# Altium PCB soldeerstation.PcbDoc
Units mil, origin at the board's own origin, x right, y up, seen from the top; angles counter-clockwise.
Board outline 6885 x 2720 mil, 2 copper layers (Top Layer, Bottom Layer); 64 components, 56 nets, 226 pads, 82 vias.
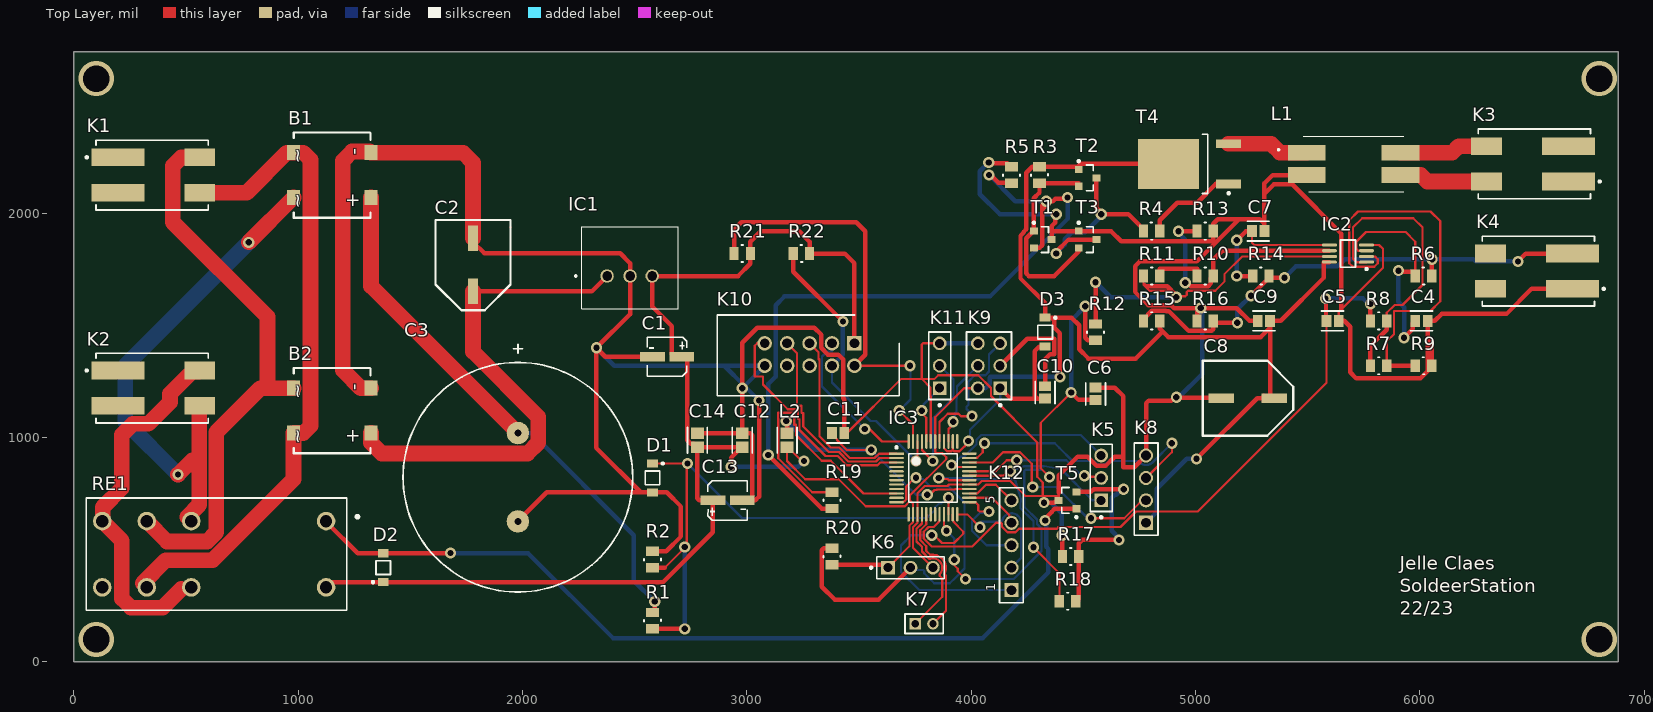
[diagram p0: Top Layer view]
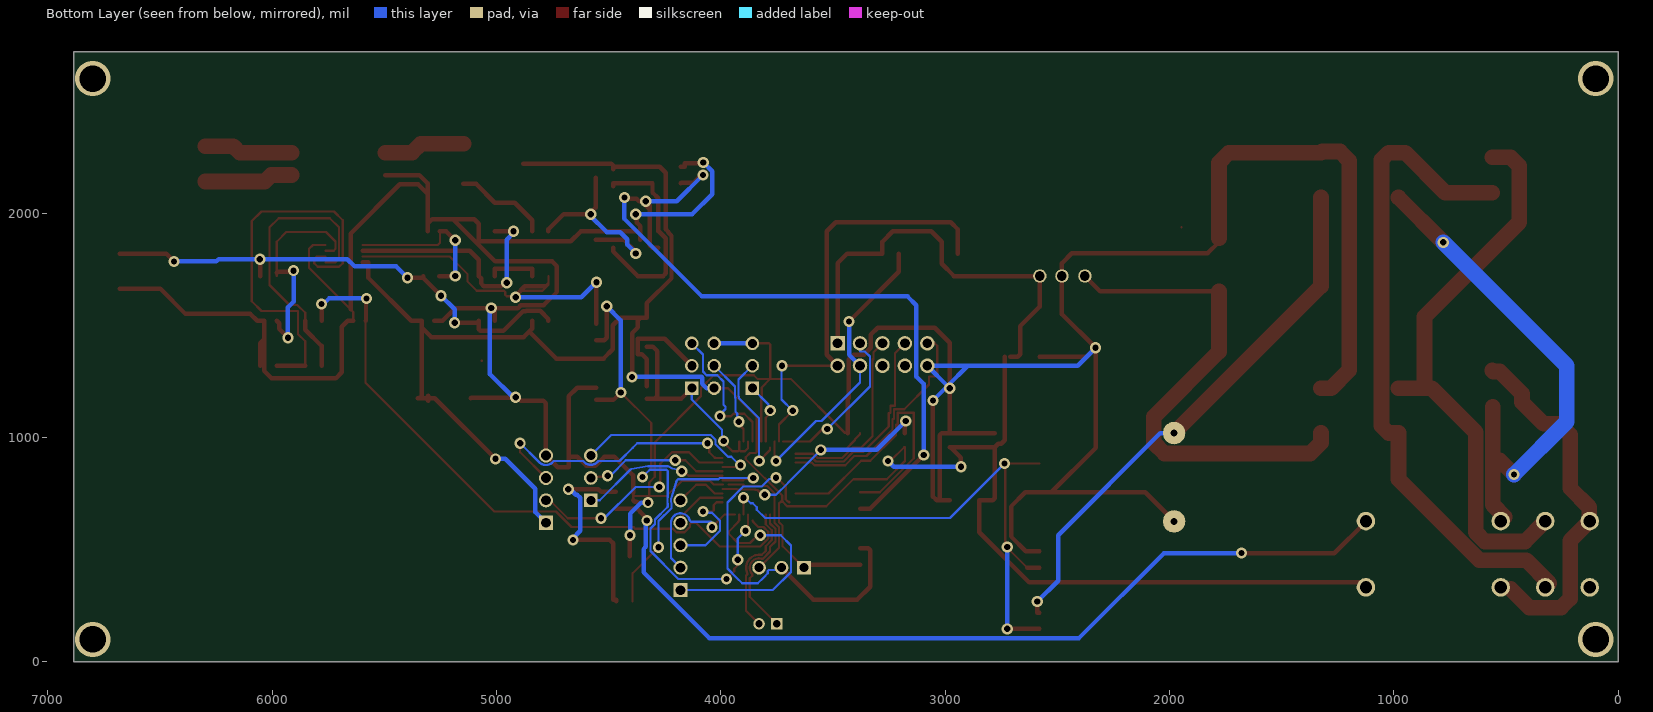
[diagram p1: Bottom Layer view, seen from below]

## Layer stack, top to bottom
Top Solder: solder mask 0.4, Solder Resist, Dk 3.5
Top Layer: signal copper 1.4
Dielectric 1: dielectric 12.6, FR-4, Dk 4.8
Bottom Layer: signal copper 1.4
Bottom Solder: solder mask 0.4, Solder Resist, Dk 3.5

## Board outline
0,0 6885,0 6885,2720 0,2720

## Design rules (kind name [scope] priority, off if disabled: settings)
Clearance [All] p1: gap=4 ignorepadtopadclearanceinfootprint=FALSE
MinimumSolderMaskSliver [All] p1: minsoldermaskwidth=3
PolygonConnect [All] p1: connectstyle=Relief reliefconductorwidth=10 reliefentries=4 polygonreliefangle="90 Angle" airgapwidth=10
RoutingVias [All] p1: holewidth=28 width=50 viastyle="Through Hole" minholewidth=28 minwidth=50 maxholewidth=28 maxwidth=50
SolderMaskExpansion [All] p1: expansion=4 istentingtop=FALSE
Width [All] p1: maxlimit=100 minlimit=10 preferedwidth=20 minimp=50.000000 maximp=50.000000 favimp=50.000000
29 further rules are at their usual default settings.

## Classes and differential pairs
component class voeding: B1 B2 C1 C2 C3 D1 D2 IC1 K1 K2 R1 R2 RE1
component class thermokoppel: C4 C5 C6 C7 C8 C9 IC2 K4 R6 R7 R8 R9 R10 R11 R12 R13 R14 R15 R16
component class PWM: K3 L1 R3 R4 R5 T1 T2 T3 T4
component class CPU: C10 C11 C12 C13 C14 D3 IC3 K5 K6 K7 K8 K9 K10 K11 K12 L2 R17 R18 R19 R20 R21 R22 T5

## Components (designator, comment, footprint, x,y, rotation, side; value= is the part's Value field where it differs from the comment)
B1 "Bridge_Rectifier" TTF 1150,2170 r270 top
B2 "Bridge_Rectifier" TTF 1150,1120 r270 top
C1 "10µf" D4L5.4 2650.86,1440.65 r180 top
C2 "100µf" CE_D8_L10 1780,1770 r270 top
C3 "4700µf" CE_D25_L25_plugin 1980,626.3 r90 top
C4 "10n" CC_0805_m 6007.59,1520 r0 top value="0.22 μF"
C5 "10n" CC_0805_m 5611.53,1520 r0 top value="0.22 μF"
C6 "10n" CC_0805_m 4555,1195 r90 top value="0.22 μF"
C7 "10n" CC_0805_m 5280,1920 r0 top value="0.22 μF"
C8 "10µf" CE_D8_L10 5233.11,1175 r0 top
C9 "100n" CC_0805_m 5305,1520 r180 top value="0.22 μF"
C10 "100n" CC_0805_m 4330,1201.53 r90 top value="0.22 μF"
C11 "100n" CC_0805_m 3407.59,1020 r0 top value="0.22 μF"
C12 "100n" CC_0805_L 2980,988.47 r90 top value="0.22 μF"
C13 "10µf" D4L5.4 2909.14,639.36 r0 top
C14 "100n" CC_0805_L 2780,988.47 r90 top value="0.22 μF"
D1 "Zener_Diode" SOD-123FL 2580,820 r270 top
D2 "1N4007" SOD-123FL 1380,420 r90 top value=15pF
D3 "1N4148" SOD-123FL 4330,1470 r270 top value=15pF
IC1 "OKI-78SR-5/1.5-W36-C" OKI78SR515W36C 2377.64,1720 r0 top
IC2 "Dual_Opamp" MSOP_8_M 5680,1820 r180 top
IC3 "ATMEGA4809" TQFP_48_M 3830,820 r0 top
K1 "2060-452/998-404" WAGO-2060-452_V 380,2170 r0 top
K2 "2060-452/998-404" WAGO-2060-452_V 380,1220 r0 top
K3 "2060-452/998-404" WAGO-2060-452_V 6480,2220 r180 top
K4 "2060-452/998-404" WAGO-2060-452_V 6497.91,1741.26 r180 top
K5 "22-28-4033" MOLX-22-28-4033_V 4580,820 r90 top
K6 "22-28-4033" MOLX-22-28-4033_V 3730,420 r0 top
K7 "M22-2510205" FP-M22-2510205-MFG 3790.63,170 r0 top
K8 "61300411121" 61300411121 4780,770 r90 top
K9 "TSW-103-07-G-D" SMTC-TSW-103-07-G-D_V 4080,1320 r90 top
K10 "5x2 box pinheader" "2x5 box pinheader" 3480,1420 r180 top
K11 "22-28-4033" MOLX-22-28-4033_V 3860,1320 r90 top
K12 "61300511121" 61300511121 4180,520 r90 top
L1 "Common_Mode_Choke" 2545 5705,2220 r270 top
L2 "Choke" CC_0805_L 3180,988.47 r270 top
R1 "68K" R_0805_M 2580,183.58 r90 top
R2 "10K" R_0805_M 2580,456.42 r270 top
R3 "4K7" R_0805_M 4305,2170 r90 top
R4 "100 ohm" R_0805_M 4805,1920 r180 top
R5 "4K7" R_0805_M 4180,2170 r270 top
R6 "5K6" R_0805_M 6016.42,1720 r0 top
R7 "18K" R_0805_M 5816.42,1320 r0 top
R8 "5K6" R_0805_M 5816.42,1520 r0 top
R9 "100 ohm" R_0805_M 6016.42,1320 r0 top
R10 "18K" R_0805_M 5043.58,1720 r0 top
R11 "18K" R_0805_M 4805,1720 r0 top
R12 "5K6" R_0805_M 4555,1470 r270 top
R13 "100 ohm" R_0805_M 5043.58,1920 r0 top
R14 "5K6" R_0805_M 5291.42,1720 r0 top
R15 "1M" R_0805_M 4805,1520 r0 top
R16 "10M" R_0805_M 5043.58,1520 r0 top
R17 "4K7" R_0805_M 4443.58,470 r0 top
R18 "10K" R_0805_M 4430,270 r0 top
R19 "10K" R_0805_M 3380,720 r90 top
R20 "4K7" R_0805_M 3380,470 r270 top
R21 "4K7" R_0805_M 2980,1820 r0 top
R22 "4K7" R_0805_M 3243.58,1820 r0 top
RE1 "RELAY_GENERAL_PURPOSE" RT42 1125,480 r180 top
T1 "Transistor_NPN" SOT_23 4319.37,1882.6 r0 top
T2 "Transistor_NPN" SOT_23 4519.37,2157.4 r0 top
T3 "Transistor_PNP" SOT_23 4519.37,1882.6 r0 top
T4 "MOSFET_P" TO_252 4974.49,2220 r180 top
T5 "Transistor_NPN" SOT_23 4430,720 r180 top

## Footprints (in the part's own frame and the unit in brackets; to place one, negate y for a bottom-side part, rotate by r counter-clockwise, add the part's x,y. Pads: shape width x height; smd on the part's side, far side on the other; paste and mask are expansions set on the pad)
"2x5 box pinheader" [mm]
  rect 1.65x1.65 hole 1.1: 1(0,0)
  round 1.65 hole 1.1: 2(0,2.54) 3(2.54,0) 4(2.54,2.54) 5(5.08,0) 6(5.08,2.54) 7(7.62,0) 8(7.62,2.54) 9(10.16,0) 10(10.16,2.54)
  silkscreen extent -5.08,-3.21 15.54,5.95, body extent -5.08,-3.2 15.24,5.74, height 9.15
2545 [mm]
  rect 1.78x4.27 smd: 1(-1.27,-5.305) 2(1.27,-5.305) 3(1.27,5.305) 4(-1.27,5.305)
  silkscreen extent -3.15,-8.6 3.15,5.69, body extent -3.15,-7.26 3.15,7.26, height 9.6
61300411121 [mm] "Pin Header, pitch 2.54 mm, THT, Vertical, single row, 4p"
  rect 1.6x1.6 hole 1.1: 1(-3.81,0)
  round 1.6 hole 1.1: 2(-1.27,0) 3(1.27,0) 4(3.81,0)
  silkscreen extent -5.23,-1.34 5.23,1.34, body extent -5.08,-1.27 5.08,1.27, height 8.57
61300511121 [mm] "Pin Header, pitch 2.54 mm, THT, Vertical, single row, 5p"
  rect 1.6x1.6 hole 1.1: 1(-5.08,0)
  round 1.6 hole 1.1: 2(-2.54,0) 3(0,0) 4(2.54,0) 5(5.08,0)
  silkscreen extent -6.5,-1.35 6.5,1.35, body extent -6.35,-1.27 6.35,1.27, height 8.57
CC_0805_L [mil]
  rect 51.36x57.33 smd paste+0 mask+0: 1(-31.53,0) 2(31.53,0)
  silkscreen extent -57,-44 57,44, body extent -67,-39 67,39, height 10
CC_0805_m [mil]
  rect 43.49x53.39 smd paste+0 mask+0: 1(-27.59,0) 2(27.59,0)
  silkscreen extent -49,-44 49,44, body extent -53,-32 53,32, height 10
CE_D8_L10 [mm]
  rect 2.9x1.1 smd: 1(-3,0) 2(3,0)
  Top Layer lines w0.254: -4.25,4.241 -4.259,4.25
  silkscreen extent -5.08,-4.25 5.16,4.25
CE_D25_L25_plugin [mm]
  round 2.54 hole 0.8: 1(0,0) 2(10,0)
  silkscreen extent -8,-13 20.07,13
D4L5.4 [mm]
  rect 2.8x1.1 smd: 1(1.8,2.048) 2(-1.521,2.048)
  silkscreen extent -2.08,-0.18 2.38,4.27
FP-M22-2510205-MFG [mm]
  rect 1.3x1.3 hole 0.8 paste-1000 mask+0: 1(-1,0)
  round 1.3 hole 0.8 paste-1000 mask+0: 2(1,0)
  silkscreen extent -2.17,-1.1 2.18,1.1, body extent -2.27,-1.2 2.27,1.2, height 0.25
MOLX-22-28-4033_V [mm] "THD, 3-Leads, Body 7.62x2.49mm, Pitch 2.54mm"
  rect 1.55x1.55 hole 1.02: 1(-2.54,0)
  round 1.55 hole 1.02: 2(0,0) 3(2.54,0)
  silkscreen extent -4.58,-1.25 3.81,1.25, body extent -3.81,-1.24 3.81,1.24, height 8.38
MSOP_8_M [mm] "TSOP, 8-Leads, Body 3x3mm, Pitch 0.65mm, IPC Medium Density"
  oval 1.7x0.35 smd: 1(-2.1,0.975) 2(-2.1,0.325) 3(-2.1,-0.325) 4(-2.1,-0.975) 5(2.1,-0.975) 6(2.1,-0.325) 7(2.1,0.325) 8(2.1,0.975)
  silkscreen extent -2.22,-1.55 0.85,1.87, body extent -1.55,-1.55 1.55,1.55, height 1.1
OKI78SR515W36C [mm]
  round 1.519 hole 1.08: 1(0,0) 2(2.6,0) 3(5.1,0)
  silkscreen extent -3.6,-3.7 8.05,5.6, body extent -2.85,-3.7 8.05,5.6, height 16.6
R_0805_M [mm] "Chip Resistor, 2-Leads, Body 2.00x1.25mm, IPC Medium Density"
  rect 1.05x1.45 smd: 1(-0.925,0) 2(0.925,0)
  silkscreen extent -0.1,-0.97 0.13,0.97, body extent -1.1,-0.72 1.1,0.72, height 0.5
RT42 [mm]
  round 2.1 hole 1.4: 11(20.3,3.75) 12(15.26,3.75) 14(25.34,3.75) 21(20.3,-3.75) 22(15.26,-3.75) 24(25.34,-3.75) A1(0,3.75) A2(0,-3.75)
  silkscreen extent -3.67,-6.35 27.16,6.35, body extent -2.21,-6.35 26.79,6.35, height 15.86
SMTC-TSW-103-07-G-D_V [mm] "THD, 6-Leads, Body 7.62x5.08mm, Pitch 2.54mm"
  rect 1.55x1.55 hole 1.02: 1(-2.54,-1.27)
  round 1.55 hole 1.02: 2(-2.54,1.27) 3(0,-1.27) 4(0,1.27) 5(2.54,-1.27) 6(2.54,1.27)
  silkscreen extent -4.58,-2.54 3.81,2.54, body extent -3.81,-2.54 3.81,2.54, height 8.38
SOD-123FL [mm] "SOD, 2-Leads, Body 2.7x1.65mm"
  rect 0.91x1.22 smd: 1(-1.635,0) 2(1.635,0)
  silkscreen extent -1.76,-0.82 0.78,1.29, body extent -1.35,-0.82 1.35,0.82, height 1
SOT_23 [mm] "SOT23, 3-Leads, Body 2.92x1.3mm, Pitch 0.95mm"
  rect 0.9x0.8 smd: 1(-1,0.95) 2(-1,-0.95) 3(1,0)
  silkscreen extent -1.12,-1.46 0.65,2.02, body extent -0.65,-1.46 0.65,1.46, height 1.11
TO_252 [mm] "DPAK, 3-Leads, Body 6.5x6.12mm, Pitch 2.28mm, IPC Low Density"
  rect 2.85x1 smd: 1(-4.4,2.28) 3(-4.4,-2.28)
  rect 6.9x5.65 smd: 2(2.4,0)
  silkscreen extent -4.53,-3.35 -1.45,3.45, body extent -2.05,-3.32 4.17,3.32, height 2.35
TQFP_48_M [mm]
  rect 1.655x0.252 smd paste+0 mask+0: 1(-4.125,2.75)
  rrect100% 1.655x0.252 smd paste+0 mask+0: 2(-4.125,2.25) 3(-4.125,1.75) 4(-4.125,1.25) 5(-4.125,0.75) 6(-4.125,0.25) 7(-4.125,-0.25) 8(-4.125,-0.75) 9(-4.125,-1.25) 10(-4.125,-1.75) 11(-4.125,-2.25) 12(-4.125,-2.75) 25(4.125,-2.75) 26(4.125,-2.25) 27(4.125,-1.75) 28(4.125,-1.25) 29(4.125,-0.75) 30(4.125,-0.25) 31(4.125,0.25) 32(4.125,0.75) 33(4.125,1.25) 34(4.125,1.75) 35(4.125,2.25) 36(4.125,2.75)
  rrect100% 0.252x1.655 smd paste+0 mask+0: 13(-2.75,-4.125) 14(-2.25,-4.125) 15(-1.75,-4.125) 16(-1.25,-4.125) 17(-0.75,-4.125) 18(-0.25,-4.125) 19(0.25,-4.125) 20(0.75,-4.125) 21(1.25,-4.125) 22(1.75,-4.125) 23(2.25,-4.125) 24(2.75,-4.125) 37(2.75,4.125) 38(2.25,4.125) 39(1.75,4.125) 40(1.25,4.125) 41(0.75,4.125) 42(0.25,4.125) 43(-0.25,4.125) 44(-0.75,4.125) 45(-1.25,4.125) 46(-1.75,4.125) 47(-2.25,4.125) 48(-2.75,4.125)
  silkscreen extent -4.25,-2.75 2.75,3.58, body extent -5.2,-5.2 5.2,5.2, height 0.25
TTF [mm]
  rect 1.7x1.5 smd: 1(2.54,4.445) 2(-2.54,4.445) 3(-2.54,-4.318) 4(2.54,-4.318)
  silkscreen extent -4.83,-4.3 4.83,4.4
WAGO-2060-452_V [mm] "Terminal Block, 2-Leads, Body 12.7x7.9mm, Pitch 4mm"
  rect 6x2 smd: 1(-4.625,2) 2(-4.625,-2)
  rect 3.5x2 smd: MP1(4.625,2) MP2(4.625,-2)
  silkscreen extent -8.3,-3.95 5.57,3.95, body extent -7.12,-3.95 5.58,3.95, height 4.5

## Part data
B1 B2: Average Rectified Current-Max=0.8A, Forward Voltage=1V, Manufacturer="Diodes Inc", Package Description="4-Pin Small Outline Integrated Circuit, Body 4.7 x 3.8 mm, Pitch 2.5 mm", Package Reference=MiniDIP-4, Package Version=05/2016, Peak Current-Max=30A, Reverse Current-Max=5µA, Reverse Voltage-Max [Vrrm]=600V, Datasheet URL=http://www.diodes.com/_files/datasheets/ds17003.pdf, Datasheet Version="Rev. 13-2, 12/2010", Manufacturer URL=http://www.diodes.com/, Mounting Technology=SurfaceMount, Package URL=http://www.diodes.com/_files/packages/MiniDIP.pdf
C1 C2 C3 C8 C13: library part Capacitor_Electrolytic, Manufacturer=Panasonic, Max Operating Temperature="105 degC", Min Operating Temperature="-55 degC", Package Quantity=500, Voltage Rating="25 V", ComponentLink1Description="Manufacturer URL", ComponentLink1URL=http://www.panasonic.com/, ComponentLink2Description=Datasheet, ComponentLink2URL=http://industrial.panasonic.com/cdbs/www-data/pdf/RDE0000/ABA0000C1181.pdf, DatasheetVersion=03/2016, Height="10.2 mm", Lead Pitch="3.1 mm", Length="10.2 mm", Mount="Surface Mount", Mounting Technology="Surface Mount", PackageDescription="2-Pin Electrolytic Aluminum Capacitor, Body 8.3 x 8.3 mm", PackageReference=EEE-FK1E221P, Packaging="Tape and Reel", Pins=2, REACH SVHC="No SVHC", RoHSCompliant=true
C4 C5 C6 C7 C9 C10 C11 C12 C14: library part Capacitor_Ceramic, Capacitance="0.22 μF", Manufacturer=KEMET, Manufacturer Part Number=C0805C224K5RACTU, Package=C0805C-DN, Temperature="-55°C to +125°C", Temperature Characteristic=X7R, Temperature Coefficient=30ppm/°C, Temperature Range High=+125°C, Temperature Range Low=-55°C, Tolerance=0.1, Voltage Rating="50 V", Automotive=No, Category=Cap, ComponentLink2Description=Datasheet, ComponentLink2URL=https://content.kemet.com/datasheets/KEM_C1003_C0G_SMD.pdf, Device Class L1="Passive Components", Device Class L2=Capacitors, Device Class L3="Ceramic Capacitors", Digikey Description="CAP CER 0.22UF 50V X7R 0805", Height=0.88mm, Ipc Land Pattern Name=CAPC200125X78, Lead Free=Yes, Material=Ceramic, Mouser Description="CAP CER 0.22UF 50V X7R 0805", Octopart=https://octopart.com/c0805c224k5ractu-kemet-144670, RoHS=TRUE
D1: Manufacturer="On Semiconductor", PartNumber=1SMB5920BT3G, ComponentLink1Description="Manufacturer URL", ComponentLink1URL=http://www.onsemi.com/, ComponentLink2Description=Datasheet, ComponentLink2URL=http://www.onsemi.com/pub_link/Collateral/1SMB5913BT3-D.PDF, ComponentLink3Description="Package Specification", ComponentLink3URL=http://www.onsemi.com/pub_link/Collateral/1SMB5913BT3-D.PDF, DatasheetVersion="Rev. 8", Mounting Technology="Surface Mount", PackageDescription="2-Pin Small Molded Package, J-Bend Lead, Body 4.33 x 3.625 mm", PackageReference=SMB-2-403A-03_H, PackageVersion="Rev. H, 05/2011", Packing="Tape and Reel", RoHS=Pb-Free, VZ Typ (V)=6.2
D2: library part Diode, Capacitance=15pF, Forward Current=1A, Manufacturer=Diotec, Max Junction Temp=+175°C, Max Repetitive Reverse Voltage=1000V, Max Surge Forward Current=27A, Peak Reverse Current=5uA, Temperature="-50°C to +175°C", Temperature Range Low=-50°C, Automotive=No, Category=Diode, ComponentLink2Description=Datasheet, ComponentLink2URL=https://datasheet.octopart.com/1N4007-Diotec-datasheet-62346875.pdf, Device Class L1="Discrete Semiconductors", Device Class L2=Diodes, Device Class L3="Rectifier Diodes", Height=2.8mm, Ipc Land Pattern Name=DIOAD888W100L520D280, Lead Free=Yes, Manufacturer Part Number=1N4007, Octopart=https://octopart.com/1n4007-diotec-4040411, Package=1N4007, Reverse Voltage=1000V, RoHS=TRUE, Temperature Range High=+175°C
D3: library part Diode, Capacitance=15pF, Forward Current=1A, Manufacturer=Diotec, Manufacturer Part Number=1N4007, Max Junction Temp=+175°C, Max Repetitive Reverse Voltage=1000V, Max Surge Forward Current=27A, Peak Reverse Current=5uA, Temperature="-50°C to +175°C", Temperature Range Low=-50°C, Automotive=No, Category=Diode, ComponentLink2Description=Datasheet, ComponentLink2URL=https://datasheet.octopart.com/1N4007-Diotec-datasheet-62346875.pdf, Device Class L1="Discrete Semiconductors", Device Class L2=Diodes, Device Class L3="Rectifier Diodes", Height=2.8mm, Ipc Land Pattern Name=DIOAD888W100L520D280, Lead Free=Yes, Octopart=https://octopart.com/1n4007-diotec-4040411, Package=1N4007, Reverse Voltage=1000V, RoHS=TRUE, Temperature Range High=+175°C
IC1: "Non-Isolated DC/DC Converter, 7.5 W, 7 to 36 V, 1.5 A, -40 to 85 degC, 3-Pin THD, RoHS", Current - Output (Max)=1.5A, Manufacturer=Murata, Operating Temperature=-40degC~85degC, Package / Case=3-SIPModule, Power (Watts) - Manufacture Series=8W, Voltage - Input (Max)=36V, Voltage - Input (Min)=7V, Voltage - Isolation=-, Voltage - Output 1=5V, Applications=ITE(Commercial), Category=PowerSupplies-BoardMount, Datasheet URL=https://datasheet.ciiva.com/8006/1790439-8006672.pdf, Datasheet Version=Oct-13, Efficiency=90.5%, Family=DCDCConverters, Features=SCP, Manufacturer URL=http://www.murata.com/, Mounting Type=ThroughHole, Number of Outputs=1, Packaging=Tube, Power (Watts) - Max=8W, Series=Okami™OKI-78SR, Size / Dimension="0.41\"Lx0.30\"Wx0.65\"H(10.4mmx7.6mmx16.5mm)", Type=LinearRegulatorReplacement, Voltage - Output 2=-, Voltage - Output 3=-
IC2: Case/Package=PDIP, Input Bias Current=1pA, Input Offset Voltage (Vos)=4.5mV, Max Operating Temperature=125°C, Max Supply Voltage=6V, Min Operating Temperature=-40°C, Min Supply Voltage=1.8V, Nominal Supply Current=100uA, Operating Supply Voltage=5.5V, Output Current=23mA, Package Quantity=60, Power Supply Rejection Ratio (PSRR)=86dB, Voltage Gain=112dB, Amplifier Type="GENERAL PURPOSE", Bandwidth=1MHz, Common Mode Rejection Ratio=60dB, Gain Bandwidth Product=1MHz, Height=3.3mm, Input Offset Voltage-Max=4.5mV, Lead Free="Lead Free", Length=9.27mm, Mount="Through Hole", Number of Amplifiers=2, Number of Channels=2, Number of Circuits=2, Number of Elements=2, Number of Pins=8, Operating Supply Current=100uA, Output Current per Channel=23mA, Packaging=Rail/Tube, Radiation Hardening=No, REACH SVHC="No SVHC", RoHS Compliant=Yes, Slew Rate=0.6V/µs, Slew Rate-Nom=0.6V/µs, Supply Current=100uA, Technology=CMOS, Unity Gain Bandwidth Product=1MHz, Width=6.35mm
IC3: Case/Package=TQFP, Max Operating Temperature=85°C, Min Operating Temperature=-40°C, Core Architecture=AVR, Interface=I2C, Memory Size=48KB, Memory Type=FLASH, Mount="Surface Mount", Number of I/Os=41, Oscillator Type=Internal, Peripherals="Brown-out Detect/Reset", RoHS Compliant=Yes, Series="megaAVR® 0, Functional Safety (FuSa)"
K1 K2 K3 K4: library part WAGO-2060, "Terminal Block, Pitch 4 mm, 1 x 2 Position, Height 4.5 mm, -60 to 105 degC, RoHS, Tape and Reel", Colour=White, Manufacturer=WAGO, Nominal current=9A, Nominal voltage=160V, Package Description="Terminal Block, Pitch 4 mm, 1 x 2 Position, Height 4.5 mm", Package Reference=2060-452, AWG=24-18, Connection=Pullspring, Contact material=Tinplated, Content=1pc(s), Datasheet URL=http://www.wago.com/infomaterial/pdf/60255126.pdf, Datasheet Version=03/2015, Height=4.5mm, Length=7.9mm, Manufacturer part No.=2060-452/998-404, Manufacturer URL=http://global.wago.com/en/index-en.jsp, Material=PPA-GFenclosure·Tin-platedcoppercontacts, Max. cross section (flexible)=0.75mm², Max. cross section (inflexible)=0.75mm², Min. cross section (flexible)=0.25mm², Min. cross section (unflexible)=0.2mm², Mounting Technology=SurfaceMount, Number of contacts=2, Pitch=4mm, Stripping length=6-7mm, Type=2060-452/998-404, Width=10.1mm
K5 K6 K11: library part CMP-1676-00001-5, "Male Header, Pitch 2.54 mm, 1 x 3 Position, Height 8.38 mm, Tail Length 3.18 mm, RoHS, Bulk", Colour=Black, Current Rating="4 A", Manufacturer=Molex, Max Operating Temperature="75 degC", Min Operating Temperature="0 degC", Package Quantity=1, Voltage Rating="250 V", ComponentLink1Description="Manufacturer URL", ComponentLink1URL=http://www.molex.com/, ComponentLink2Description=Datasheet, ComponentLink2URL=http://www.molex.com/pdm_docs/sd/022284033_sd.pdf, Contact Finish=Gold, Contact material=Brass, Contact Plating=Gold, DatasheetVersion="Rev. G, 01/2012", Height="8.38 mm", Lead Pitch="0.1 inch", Length="7.62 mm", Mount="Through Hole", Mounting Technology="Through Hole", PackageDescription="Male Header, Pitch 2.54 mm, 1 x 3 Position, Height 8.38 mm, Tail Length 3.18 mm", PackageReference=22-28-4033, Packaging=Bulk, Pins=3, REACH SVHC=Unknown, RoHSCompliant=true, Rows=1
K7: library part CMP-15831-000005-1, "CONN HEADER VERT 2POS 2MM", Current Rating=2A, Manufacturer=Harwin, Package=0, Temperature="-40°C to +105°C", Temperature Range High=+105°C, Temperature Range Low=-40°C, Automotive=No, Category=Conn, ComponentLink2Description=Datasheet, ComponentLink2URL=https://cdn.harwin.com/pdfs/C018XX_M22_Series_Connectors.pdf, Conn Gender=Male, Conn Orientation=Vertical, Contact material=Gold,Nickel, Device Class L1=Connectors, Device Class L2="Headers and Wire Housings", Device Class L3=unset, Digikey Description="CONN HEADER VERT 2POS 2MM", Footprint Url=https://cdn.harwin.com/pdfs/M22-251.pdf, Height=5.45mm, Lead Free=Yes, Manufacturer Part Number=M22-2510205, Mouser Description="Headers & Wire Housings 2 PIN SIL VERTICAL GOLD PIN HEADER", Number of contacts=2, Number Of Rows=1, Octopart=https://octopart.com/m22-2510205-harwin-2538221, Pitch=2mm, RoHS=TRUE
K8: library part CMP-1502-01064-1, "THT Vertical Pin Header WR-PHD, Pitch 2.54 mm, Single Row, 4 pins", Contact Resistance=20mOhm, Manufacturer="Wurth Elektronik", Operating Temperature=-40to105degC, Rated Current=3A, Withstanding Voltage=500VAC, Working Voltage=250VAC, Datasheet URL=https://katalog.we-online.de/em/datasheet/6130xx11121.pdf, Gender=Male, Manufacturer URL=http://www.we-online.de, Mounting Technology=THT, Orientation=Vertical, Package Reference=61300411121, Packaging=Bag, Part Number=61300411121, Pin Number=4, Pitch=2.54mm, Publisher=WurthElektronik, Row Number=Single
K9: library part CMP-2000-07329-1, "Through Hole Header, Pitch 2.54 mm, 2 x 3 Position, Height 8.58 mm, Tail Length 2.54 mm, -55 to 125 degC, RoHS, Bulk", Color=Black, Manufacturer=Samtec-Inc., Package Description="Through Hole Header, Pitch 2.54 mm, 2 x 3 Position, Height 8.58 mm, Tail Length 2.54 mm", Category=Connectors,Interconnects, Connector Type=Header,Unshrouded, Contact Finish=Gold, Contact Finish Thickness=10µin(0.25µm), Contact Mating Length="0.230\"(5.84mm)", Contact Type=MalePin, Datasheet URL=http://suddendocs.samtec.com/catalog_english/tsw_th.pdf, Datasheet Version=12/2015, Family=RectangularConnectors-Headers,MalePins, Fastening Type=-, Features=-, Manufacturer URL=http://www.samtec.com/, Mounting Technology=ThroughHole, Mounting Type=ThroughHole, Number of Positions=6, Number of Positions Loaded=All, Number Of Rows=2, Package Reference=TSW-103-07-G-D, Package URL=http://suddendocs.samtec.com/prints/tsw-xxx-xx-xxx-x-xx-xxx-mkt.pdf, Packaging=Bulk, Pitch="0.100\"(2.54mm)", Row Spacing="0.100\"(2.54mm)", Series=TSW, Termination=Solder
K10: "Connector", Arrow Part Number=T821110A1S100CEU, Manufacturer_Name=Amphenol, Mouser Part Number=N/A, Arrow Price/Stock=https://www.arrow.com/en/products/t821110a1s100ceu/amphenol-fci?region=europe, Datasheet Link=https://docs.rs-online.com/e09c/0900766b81359cba.pdf, Height=9.15mm, Manufacturer_Part_Number=T821110A1S100CEU, Mouser Price/Stock=https://www.mouser.co.uk/ProductDetail/Amphenol/T821110A1S100CEU?qs=3IN%252Br8p6BrNf%2FuKCWm44Bg%3D%3D
K12: library part 5pin, "THT Vertical Pin Header WR-PHD, Pitch 2.54 mm, Single Row, 5 pins", Contact Resistance=20mOhm, Manufacturer="Wurth Elektronik", Operating Temperature=-40to105degC, Rated Current=3A, Withstanding Voltage=500VAC, Working Voltage=250VAC, Datasheet URL=https://katalog.we-online.de/em/datasheet/6130xx11121.pdf, Gender=Male, Manufacturer URL=http://www.we-online.de, Mounting Technology=THT, Orientation=Vertical, Package Reference=61300511121, Packaging=Bag, Part Number=61300511121, Pin Number=5, Pitch=2.54mm, Publisher=WurthElektronik, Row Number=Single
L1: Case/Package=1808, Current=2A, Current Rating=2.3A, DC Resistance (DCR)=60mR, Insulation Resistance=10MR, Max Operating Temperature=85°C, Max Voltage Rating (DC)=50V, Min Operating Temperature=-40°C, Package Quantity=1, Test Frequency=100MHz, DC Current=2A, DC Resistance-Max=60mR, Depth=4.7mm, Element Configuration=Dual, Height=2mm, Impedance=900R, Lead Free="Lead Free", Length=0.185inch, Max Current Rating=2A, Max DC Current=2A, Mount="Surface Mount", Number of Lines=2, Number of Pins=4, Packaging="Tape and Reel", Radiation Hardening=No, REACH SVHC="No SVHC", RoHS Compliant=Yes, Series=ACM, Termination=Flat, Voltage Rating=50V, Voltage Rating (DC)=50V, Width=4.5mm
L2: Case/Package=1350, Current Rating=8.5A, DC Resistance (DCR)=14.1mR, Inductance=10uH, Inductance Tolerance=20%, Max Operating Temperature=155°C, Min Operating Temperature=-40°C, Package Quantity=1, Ratings=AEC-Q200, Resistor Type=Wirewound, Saturation Current=10A, Self Resonant Frequency=18MHz, Series Resistance=14.1R, Test Frequency=100kHz, Height=4.7mm, Height - Seated (Max)=0.197inch, Length=0.512inch, Max DC Current=8.5A, Mount="Surface Mount", Packaging="Tape and Reel", RMS Current (Irms)=8.5A, RoHS Compliant=Yes, Series=WE-HCI, Shielding=Shielded, Termination=SMD/SMT, Tolerance=20%, Width=12.8mm
R1 R2 R3 R4 R5 R6 R7 R8 R9 R10 R11 R12 R13 R14 R15 R16 R17 R18 R19 R20 R21 R22: library part Resistor, Manufacturer="Vishay Dale", Part Number=CRCW08050000Z0EA
RE1: Ambient Temperature Range High=+85°C, Ambient Temperature Range Low=-40°C, Coil Power=403mW, Coil Resistance=62Ω, Coil Voltage=5V, Current Rating=8A, Manufacturer="TE Connectivity", Manufacturer Part Number=RT424005, Automotive=No, Category=Relay, Coil Type=Non-Latching, ComponentLink2Description=Datasheet, ComponentLink2URL=https://www.te.com/commerce/DocumentDelivery/DDEController?Action=showdoc&DocId=Data+Sheet%7FRT2%7F1014%7Fpdf%7FEnglish%7FENG_DS_RT2_1014.pdf%7F5-1393243-9, Device Class L1=Electromechanical, Device Class L2=Relays, Device Class L3="Power Relays", Digikey Description="RELAY GENERAL PURPOSE DPDT 8A 5V", Height=15.7mm, Lead Free=Yes, Mouser Description="General Purpose Relay, Rt2 Series, Power, Non Latching, Dpdt, 5 Vdc, 8 A Rohs Compliant: Yes", Number of contacts=2, Octopart=https://octopart.com/5-1393243-9-te+connectivity-41835766, Package=RT424005, RoHS=TRUE, Throw Configuration=DPDT
T1 T2 T5: Manufacturer="On Semiconductor", PartNumber=BC547C, ComponentLink1Description="Manufacturer URL", ComponentLink1URL=http://www.onsemi.com/, ComponentLink2Description=Datasheet, ComponentLink2URL=http://www.onsemi.com/pub_link/Collateral/BC546-D.PDF, ComponentLink3Description="Package Specification", ComponentLink3URL=http://www.onsemi.cn/pub_link/Collateral/2N6426-D.PDF, DatasheetVersion="Rev. 7", fT Min (MHz)=150, IC Continuous (A)=0.1, Mounting Technology="Through Hole", PackageDescription="3-Pin Transistor Outline, Body 4.825 x 3.685 mm, Pitch 1.27 mm", PackageReference=TO-92-3-29-11_AM_SL, PackageVersion="Rev. AM", Packing="Bulk Box", Polarity=NPN, RoHS=FALSE
T3: Manufacturer="On Semiconductor", PartNumber=BC557C, ComponentLink1Description="Manufacturer URL", ComponentLink1URL=http://www.onsemi.com/, ComponentLink2Description=Datasheet, ComponentLink2URL=http://www.onsemi.com/pub_link/Collateral/BC556B-D.PDF, ComponentLink3Description="Package Specification", ComponentLink3URL=http://www.onsemi.cn/pub_link/Collateral/2N6426-D.PDF, DatasheetVersion="Rev. 3", IC Continuous (A)=-0.1, Mounting Technology="Through Hole", PackageDescription="3-Pin Transistor Outline, Body 4.825 x 3.685 mm, Pitch 1.27 mm", PackageReference=TO-92-3-29-11_AM_SL, PackageVersion="Rev. AM", Packing="Bulk Box", Polarity=PNP, RoHS=FALSE
T4: Continuous Drain Current Id=2.4A, Current Temperature=25°C, Drain Source Voltage Vds=20V, Manufacturer="Fairchild Semiconductor", On Resistance Rds(on)=52mohm, Operating Temperature Max=150°C, Operating Temperature Min=-55°C, Operating Temperature Range=-55°Cto+150°C, Package / Case=SOT-23, Package Description="3-Pin Small Outline Transistor, Body 2.92 x 1.4 mm, Pitch 0.95 mm", Package Reference=SSOT3L, Package Version="Rev. 3, 05/2015", Power Dissipation Pd=500mW, Pulse Current Idm=10A, Rds(on) Test Voltage Vgs=-4.5V, Threshold Voltage Vgs Typ=-800mV, Voltage Vds Typ=-20V, Voltage Vgs th Max=-1.5V, Current Id Max=2.4A, Datasheet URL=https://www.fairchildsemi.com/datasheets/FD/FDN304P.pdf, Datasheet Version="Rev. C, 01/2001", External Depth=2.5mm, External Length / Height=1.12mm, External Width=3.05mm, Full Power Rating Temperature=25°C, Manufacturer URL=https://www.fairchildsemi.com/, Mounting Technology=SurfaceMount, No. of Pins=3, Package URL=https://www.fairchildsemi.com/package-drawings/MA/MA03B.pdf, Reel Quantity=3000, SMD Marking=304P, SVHC=NoSVHC(19-Dec-2012), Tape Width=8mm, Termination Type=SMD, Transistor Case Style=SOT-23, Transistor Polarity=PChannel, Voltage Vds=20V, Voltage Vgs Max=-800mV, Voltage Vgs Rds on Measurement=-4.5V

## Via types
v1: diameter 50, hole 28, Top Layer to Bottom Layer, 78 vias
v2: diameter 157.48, hole 118.11, Top Layer to Bottom Layer, 4 vias

## Nets (pads, with @x,y where several pads share a name; then routed paths per layer and width w, separated by ;. In a path a pad name is that pad's centre, name@x,y a point inside that pad or via, vN(x,y) a via of type N, cw(c..) or ccw(c..) an arc to the next point about the centre after c; other vN are vias at no path point)
+5: C1.2 C8.2 C9.1 C12.1 C13.2 C14.1 D2.1 D3.1 IC1.3 IC2.8 IC3.14 IC3.42 K6.1 K8.1 K9.2 K10.1 L2.2 R3.2 R15.2 R20.2 R21.2 R22.2 RE1.A1 T2.1 T4.2 | length 12374.1
  Top Layer w10: v1(3255,895) 3244.93,895 3182.98,956.95 L2.2 3180,895.45 3261.11,814.34 3409.63,814.34 3529.97,694 3705,694 3725,714 3733.28,714 3741.42,705.87 IC3.14 ; K6.1 3725,515 3725,606.42 3741.39,622.81 IC3.14 ; 3723.99,715.01 3727.16,718.18 3727.16,742.16 3888.81,903.81 3888.81,912.1 3869.91,931 3845.7,931 3839.84,936.86 IC3.42 3839.84,1090.89 3968.96,1220 K9.2
  Top Layer w20: RE1.A1@1111.69,355.63 D2.1 2626.63,355.63 2849,578 C13.2@2849,720 ; C1.2 2677.28,1360 2665.63,1371.65 2665.63,1496.84 2578.43,1584.04 IC1.3 2961.42,1720 3016.42,1775 3016.42,1873 3062.42,1919 3234,1919 3280,1873 R22.2 3437,1820 3480,1777 K10.1 ; C1.2@2735.33,1360 2735.33,987.69 2750.4,972.63 2764.32,972.63 C14.1 ; C13.2 C13.2@2849,720 ; v1(2930,870) 2930,909.93 C12.1@2977.02,956.95 ; C12.1 C12.1@2977.02,956.95 ; R20.2 3630,433.58 K6.1 ; v1(4396.02,1270) 4396.02,1465.54 4371,1490.56 4371,1523.37 4360,1534.37 ; T2.1 T2.1@4480,2206.42 ; R15.2 4841.42,1486 4854.92,1472.5 ; T4.2 4488,2220 4480,2212 T2.1@4480,2206.42 ; v1(5005,905) 5275,1175 C8.2@5306.04,1175 ; C8.2@5304.13,1163.35 5306.04,1165.25 C8.2@5306.04,1175 ; C8.2@5304.13,1186.65 5306.04,1184.75 C8.2@5306.04,1175 ; C8.2 C8.2@5344.24,1175 ; IC2.8 5573,1781.61 5573,1713 5380,1520 C9.1 5332.59,1489 ; C14.1 C12.1@2977.02,956.95 ; C14.1 2780,729 2789,720 C13.2@2849,720 ; 4360,1534.37 4448,1534.37 4482,1500.37 4482,1393 4523,1352 4734.42,1352 4854.92,1472.5 ; 4360,1534.37 D3.1 4330,1599.51 4220.28,1709.23 4220.28,1899.77 4235.51,1915 4235.51,1918.18 4246,1928.66 4246,2180.42 4272,2206.42 T2.1@4480,2206.42 ; 4854.92,1472.5 4879.42,1448 5291.59,1448 5332.59,1489 ; C8.2@5306.04,1175 C8.2@5344.24,1175 ; 5332.59,1489 5332.59,1186.65 C8.2@5344.24,1175
  Bottom Layer w20: v1(2930,870) 3230,870 v1(3255,895) ; K9.2 4064,1220 4083,1239 4083,1267 4086,1270 v1(4396.02,1270) ; K8.1 4828,668 4828,772 4961,905 v1(5005,905)
+VIN: B1.1 C3.2 R1.2 | length 2420.3
  Top Layer w20: R1.2 2590,220 v1(2590,269)
  Top Layer w70: B1.1 1325,1675 C3.2
  Bottom Layer w20: C3.2 2042,1020 2497,565 2497,362 v1(2590,269)
GND: B1.2 B2.2 C1.1 C2.1 C3.1 C4.2 C5.2 C6.2 C7.2 C8.1 C9.2 C11.2 C12.2 C13.1 C14.2 D1.2 IC1.2 IC2.4 IC3.15 IC3.29 IC3.43 K4.1 K6.3 K8.4 K9.6 K10.10 K11.3 L1.2 R2.1 R5.1 R9.2 R13.2 R16.1 R17.1 T1.3 T3.1 T5.3 | length 20894.1
  Top Layer w10: C11.2 3447,1020 3688.51,1261.51 3779.67,1261.51 ; IC3.15 3761.07,619.87 3741,599.79 3741,509 K6.3 ; IC3.15 3761.1,752.01 3793.09,784 3894.91,784 3901.38,790.47 IC3.29@3964.84,790.47 ; IC3.43 3820.16,1183.26 3818.49,1184.93 3818.49,1222.7 3779.67,1261.51 ; K11.3 3785.53,1420 3779.67,1414.14 3779.67,1261.51 ; IC3.29@3991.67,790.47 IC3.29 4032,790.47 4047.53,806 4175.18,806 4241.18,740 4320,740 ; T5.3 4390.63,740 ; 4390.63,753 4390.63,740 ; C5.2 5639.12,1560 5651,1571.88 5836,1756.88 5836,1841 5818.61,1858.39 IC2.4 ; 3779.67,1261.51 3837.51,1261.51 3853.51,1277.51 4032,1277.51 4088.49,1221.02 4088.49,1184.93 4295,978.42 4295,825 4320,800 4320,740 ; 4320,740 4390.63,740
  Top Layer w20: C2.1 1780,1872 1831,1821 2436,1821 2480,1777 IC1.2 2480,1550 v1(2330,1400) ; C3.1 2109.33,755.63 2528,755.63 ; R2.1 2640.81,492.83 2707,559.02 2707,692.63 2644,755.63 D1.2 2528,755.63 ; C1.1 2370,1360 v1(2330,1400) ; C14.2 C12.2 ; C13.1 C13.1@3025,720 ; v1(3055,1165) 3055,737 3038,720 C13.1@3025,720 ; C11.2 3435.18,1170.82 3430,1176 3430,1348 3408,1370 3361.44,1370 3331.52,1399.92 3331.52,1459.1 3301.62,1489 3047,1489 2980,1422 v1(2980,1220) C12.2 ; v1(4078.95,2225.99) 4081.69,2223.25 4161.46,2223.25 4161.46,2206.42 R5.1 ; v1(4325,710) 4371.2,710 4375.45,714.25 4384.88,714.25 T5.3 ; T1.3 4358.74,1910.74 ; v1(4380,1995) 4374.26,1989.26 4374.26,1957.88 4358.74,1942.36 4358.74,1910.74 ; 4390.63,753 4390.63,831 4474.63,915 4519.22,915 4560.73,873.49 4599.27,873.49 4640.78,915 4679,915 ; v1(4405,565) 4407.17,562.83 R17.1 ; C6.2 4640,1222.59 4679,1183.59 4679,915 ; R16.1 5007.17,1560.17 v1(5024,1577) ; C8.1 5112.5,1177.5 4917.5,1177.5 v1(4915,1180) 4906.88,1180 4891.88,1165 4791.65,1165 4780,1153.35 K8.4 4727,867 4679,867 4679,915 ; C9.2 5241,1520 5184,1577 v1(5024,1577) ; C7.2 5307.59,1953 ; L1.2 5344,2170 5307.59,2133.59 5307.59,2086.59 ; C5.2 5664,1520 5690,1494 5690,1291 5716,1265 6003.18,1265 6035.18,1297 6035.18,1438.65 ; 5651,1571.88 5651,1909 5431,2129 5350,2129 5307.59,2086.59 ; R9.2 6052.83,1421 6035.18,1438.65 ; K4.1 6498,1662.52 6386.48,1551 6098,1551 6067,1520 C4.2 6035.18,1438.65 ; v1(2330,1400) 2330,953.63 2528,755.63 ; C12.2 3016,1020 3025,1011 C13.1@3025,720 ; 4358.74,1910.74 4368,1920 T3.1 4624,1920 4669,1875 5072,1875 5080,1883 R13.2 5080,1953 5100,1973 5194,1973 ; v1(5024,1577) 4904.77,1577 4891.77,1590 4880.03,1590 4879.48,1590.54 4789.46,1590.54 4731,1649 4731,1764 4752,1785 5006,1785 5194,1973 ; 5194,1973 5287.59,1973 5307.59,1953 ; 5307.59,1953 5307.59,2086.59
  Top Layer w70: B2.2 1280,1220 1200,1300 1200,2233.77 1241.01,2274.77 1320.23,2274.77 B1.2 1735,2270 1780,2225 C2.1
  Bottom Layer w20: v1(2330,1400) 2410,1320 2900,1320 ; v1(2980,1220) v1@2990,1230 ; v1(3055,1165) v1@2990,1230 ; K11.3 K9.6 ; v1(4078.95,2225.99) 4078.01,2225.99 4039,2186.98 4039,2084.51 4128.51,1995 v1(4380,1995) ; v1(4325,710) 4355.88,710 4405,660.88 v1(4405,565) ; v1@4925.94,1179.06 5030,1283.12 5030,1562.88 5024,1568.88 v1(5024,1577) ; 2900,1320 v1@2990,1230 ; 2900,1320 K10.10 v1@2990,1230
NetB1_3: B1.3 B2.4 K1.MP2 RE1.11 | length 2926.6
  Top Layer w70: RE1.11@307.5,350.65 409.85,453 618.48,453 980,814.52 B2.4 1024,1020 1056,1052 1056,2238 1024,2270 B1.3 949.74,2270 771,2091.26 K1.MP2
NetB1_4: B1.4 K2.MP2 RE1.22 | length 2245.7
  Top Layer w70: v1(465,835) 528.19,898.19 ; RE1.22@505.93,645.93 560,700 560,898.19 K2.MP2@560,1136.89 ; v1(780,1870) B1.4
  Bottom Layer w70: v1(465,835) 230,1070 230,1320 v1(780,1870)
NetB2_1: B2.1 C2.2 IC1.1 | length 2250.4
  Top Layer w20: C2.2 1780,1651 2308.64,1651 IC1.1
  Top Layer w70: B2.1 1325,977 1373,929 2023,929 2071,977 2071,1092 1780,1383 C2.2@1780,1651
NetB2_3: B2.3 K1.MP1 RE1.21 | length 2537.3
  Top Layer w70: RE1.21 416.42,537 594.99,537 636,578.01 636,1024 832,1220 864,1220 ; K1.MP1 480,2248.74 442,2210.74 442,1960 864,1538 864,1220 ; B2.3 864,1220
NetC4_1: C4.1 IC2.3 R6.1 | length 1015.1
  Top Layer w10: IC2.3 5726.2,1832.8 5718,1841 5718,1874 5760,1916 5937,1916 5980,1873 5980,1735 R6.1
  Top Layer w20: v1(5905,1744) 5910.74,1738.26 5976.74,1738.26 R6.1@5980,1735 ; v1(5930,1445) 5968.89,1483.89 5968.89,1508.89 C4.1
  Bottom Layer w20: v1(5905,1744) 5905,1605.63 5930,1580.63 v1(5930,1445)
NetC5_1: C5.1 IC3.20 R8.1 | length 2940.7
  Top Layer w10: IC3.20@3859.5,630 3855.81,626.31 3855.81,623.35 3834.09,601.63 3810.72,601.63 3789,579.91 3789,550.09 3825.09,514 4004.91,514 4110.91,620 4132.61,620 4135.54,617.07 4137.83,614.78 4137.83,602.08 4149.95,589.95 4162.4,577.5 4180,577.5 4197.6,577.5 4210.05,589.95 4214.1,594 4383.09,594 4390.09,601 4666,601 4735,670 5010,670 5583.94,1243.94 C5.1
  Top Layer w20: v1(5580,1620) 5581.97,1618.03 5581.97,1521.97 C5.1 ; R8.1 v1(5780,1595)
  Bottom Layer w20: v1(5580,1620) 5746.88,1620 5771.88,1595 v1(5780,1595)
NetC6_1: C6.1 IC3.21 R12.2 | length 2401.7
  Top Layer w10: IC3.21 3879.21,606.61 3890,595.82 v1(3890,585) ; v1@3918,445 3918,437.82 3940.46,415.37 3940.46,404.54 v1(3975.46,369.54) ; v1(4349.63,824) 4349.63,825 4311,863.63 4311,1065.41 v1(4446,1200.41)
  Top Layer w20: v1(4446,1200.41) 4479,1167.41 C6.1 ; v1(4509,1585) 4509,1444.58 4520,1433.58 R12.2
  Bottom Layer w10: v1(3890,585) 3925,550 v1(3925,455) ; v1(3975.46,369.54) 4189.64,369.54 4314,493.9 4314,595.09 4294,615.09 4294,634.66 4239.52,689.14 4236.59,692.07 4236.59,705.18 ccw(c4180,720) 4236.59,734.82 4236.59,850.73 4242.45,856.59 4317.04,856.59 4319.97,853.66 v1(4349.63,824)
  Bottom Layer w20: v1(4446,1200.41) 4446,1522 v1(4509,1585)
NetC7_1: C7.1 IC2.5 R14.1 | length 716.3
  Top Layer w10: C7.1 5252.41,1868 5262.02,1858.39 IC2.5
  Top Layer w20: v1(5184,1720) R14.1 ; v1(5184,1879) 5225,1920 C7.1
  Bottom Layer w20: v1(5184,1720) v1(5184,1879)
NetC10_1: C10.1 D3.2 IC3.38 IC3.40 K9.1 | length 994
  Top Layer w10: IC3.40 3879.21,951.91 3892.28,938.84 3913,938.84 3918.58,944.42 ; IC3.38 3918.58,944.42 ; v1(3988,985) 3988,978 3948.84,938.84 3924.16,938.84 3918.58,944.42
  Top Layer w20: K9.1 4176.06,1173.94 4295.06,1173.94 ; C10.1 4295.06,1173.94 ; D3.2 4304,1405.63 4284,1385.63 4284,1185 4295.06,1173.94
  Bottom Layer w10: v1(3988,985) 3995,992 3995,1035 4130,1170 K9.1
NetC10_2: C10.2 K9.3 | length 527.7
  Top Layer w20: K9.3 4250,1440 4370.02,1440 4370.02,1371.72 4352,1371.72 4330,1349.72 C10.2
NetC11_1: C11.1 IC3.28 L2.1 | length 1230.8
  Top Layer w10: C11.1 3380,1015.05 3402.44,992.61 3402.44,988.75 3446.18,945 v1(3555,945) ; v1(3805,745) 3815.82,745 3837.36,766.54 3847.1,766.54 3848.57,768 3927.34,768 3930.12,770.79 IC3.28
  Top Layer w20: v1(3176,1074) 3180,1070 L2.1
  Bottom Layer w10: v1(3555,945) 3700,800 3700,799.09 3754.09,745 v1(3805,745)
  Bottom Layer w20: v1(3176,1074) 3305,945 v1(3555,945)
NetD1_1: D1.1 IC3.22 R1.1 R2.2 | length 2618
  Top Layer w10: D1.1 2697.63,884.37 v1(2736,884.37) 2733,881.37 v1@2733,509 ; 2635,420 2724,509 v1(2724,512) ; IC3.22 v1(3898.93,732)
  Top Layer w20: R1.1 v1(2724,147.17) ; R2.2 2635,420 ; v1(2724,512) 2727,509 v1@2733,509
  Bottom Layer w10: v1(2736,884.37) 2979.37,641 3803,641 3840.44,678.44 3840.44,689.7 3857.76,707.02 3867.34,707.02 3892.32,732 v1(3898.93,732)
  Bottom Layer w20: v1(2724,147.17) v1(2724,512)
NetD2_2: D2.2 RE1.A2 T5.1 | length 3957.5
  Top Layer w20: RE1.A2@1127.16,622.84 1265.63,484.37 D2.2 1679.37,484.37 v1(1680,485) ; v1(4330,630) 4330,638.12 4358.68,666.8 4358.68,668.46 4372.82,682.6 T5.1
  Bottom Layer w20: v1(1680,485) 2025.13,485 2403.97,106.17 4051.79,106.17 4345,399.38 4345,503.13 4335,513.13 4335,625 v1(4330,630)
NetIC2_1: IC2.1 R7.1 R8.2 | length 1284.3
  Top Layer w10: IC2.1 5718,1781.61 5702,1797.61 5702,1937 5743,1978 5971,1978 6012,1937 6012,1680 5923,1591 5888,1591 5852.83,1555.83 R8.2
  Top Layer w20: R7.1 5780,1408.17 5852.83,1481 R8.2
NetIC2_2: IC2.2 R7.2 R9.1 | length 1810.4
  Top Layer w10: IC2.2 5800,1807.2 5813,1794.2 5813,1777 5797,1761 5702,1761 5686,1777 5686,1969 5725,2008 6048,2008 6091,1965 6091,1607 6048,1564 5885,1564 5885,1461 5852.83,1428.83 R7.2
  Top Layer w20: R7.2 R9.1
NetIC2_6: IC2.6 R10.2 R13.1 | length 1094.4
  Top Layer w20: v1(4925,1920) R13.1 ; v1(4954.97,1690.03) 4963.08,1690.03 4978.12,1675 5057.61,1675 5069.33,1686.72 5069.33,1709.33 R10.2 5080,1792.8 5120,1832.8 IC2.6
  Bottom Layer w20: v1(4925,1920) 4925,1911.88 4954.97,1881.92 v1(4954.97,1690.03)
NetIC2_7: IC2.7 R11.1 R12.1 | length 1744.4
  Top Layer w10: R11.1 4768.58,1689 4772.58,1685 ; 4782.58,1675 4772.58,1685 ; IC2.7 5208.2,1807.2 5129,1728 5129,1695 5088,1654 4966.86,1654 4961,1648.14 4961,1636 4955,1630 4920,1630 v1(4915,1625) 4915,1628 4889,1654 4795.58,1654 4778.58,1671 4768.58,1681 4772.58,1685
  Top Layer w20: R12.1 v1(4555,1692) ; 4782.58,1675 4875,1675 4892.5,1657.5 4892.5,1655.62 4915,1633.12 v1(4915,1625)
  Bottom Layer w20: v1(4555,1692) 4622,1625 v1(4915,1625)
NetIC3_1: IC3.1 K10.5 | length 826.2
  Top Layer w10: K10.5 3320.2,1379.8 3320.2,1349 3324,1349 3324,1005.98 3373.98,956 3412.55,956 3459.55,909 3569.91,909 3589.18,928.27 IC3.1
NetIC3_2: IC3.2 K10.7 | length 903.7
  Top Layer w10: K10.7 3224,1376 3224,1142 3244,1142 3244,1109.68 3251.67,1109.68 3251.67,1049.31 3365.86,935.12 3410.81,935.12 3452.93,893 3576.54,893 3592.12,908.58 IC3.2
NetIC3_3: IC3.3 K10.9 | length 1061.1
  Top Layer w10: K10.9 3047,1420 3036,1409 3036,1272.35 3072.35,1272.35 3072.35,1236 3182.35,1126 3228,1126 3228,1082.99 3235.67,1082.99 3235.67,1033.31 3351.52,917.46 3405.84,917.46 3446.3,877 3583.17,877 3595.06,888.9 IC3.3
NetIC3_10: IC3.10 R19.2 | length 1238.8
  Top Layer w10: R19.2 3291.58,756.42 3140,908 3140,1110 3212,1110 3212,1056.68 3219.67,1056.68 3219.67,1011.33 3334,897 3375.1,897 3521,751.1 IC3.10
NetIC3_12: IC3.12 K6.2 R20.1 | length 1686.8
  Top Layer w10: IC3.12@3695.16,711.76 3698.85,715.45 3701.81,715.45 3711.16,724.8 3711.16,782.27 3749.35,820.46 v1(3754.54,820.46)
  Top Layer w20: R20.1 3344,506.42 3335,497.42 3335,335 3392,278 3588,278 K6.2
  Bottom Layer w10: K6.2 3737.07,412.93 3740,410 3786.67,410 3789.6,407.07 3791.06,405.61 3791.06,394.66 3810.58,375.14 3835.34,350.38 3870.36,350.38 3905.38,350.38 3930.14,375.14 3971,416 3971,710.84 3900.09,781.75 3818.25,781.75 3785.33,814.67 3760.33,814.67 v1(3754.54,820.46)
NetIC3_16: IC3.16 K7.1 | length 620.7
  Top Layer w10: K7.1 3872,290.74 3872,373 3860.71,384.29 3860.71,388.43 3860.71,392.07 ccw(c3830,420) 3818.3,459.83 3816.94,459.83 3812.8,459.83 3780.79,491.84 3780.79,513.05 3757,536.83 3757,593.17 3780.76,616.92 IC3.16
NetIC3_17: IC3.17 K7.2 | length 589.8
  Top Layer w10: IC3.17 3800.47,614.01 3773,586.54 3773,543.46 3800.47,515.99 3800.47,494.78 3818.18,477.07 3822.32,477.07 3822.92,477.07 cw(c3830,420) 3882.44,396.39 3882.44,394.33 3882.44,390.19 3888,384.63 3888,228 K7.2
NetIC3_23: IC3.23 K12.1 | length 1077.4
  Top Layer w10: v1(3825,565) 3835.82,565 3870.82,530 3923.84,530 3965.6,571.76 3965.6,580.05 3922.3,623.35 3922.3,626.31 3918.58,630.03 IC3.23
  Bottom Layer w10: v1(3825,565) 3733.86,565 3688,519.14 3688,401 3769,320 K12.1
NetIC3_24: IC3.24 K12.2 | length 589.3
  Top Layer w10: IC3.24 3982.42,657.58 v1(4040,600)
  Bottom Layer w10: v1(4040,600) 4040,619.14 4042.93,622.07 4045.86,625 4133.83,625 4136.76,627.93 4138.65,629.82 cw(c4180,620) 4221.68,628.3 4222.78,623.18 cw(c4213,621.08) 4223,621.08 4223,463 K12.2
NetIC3_25: IC3.25 K12.3 | length 458.5
  Top Layer w10: IC3.25 4019.97,711.73 4032.35,699.36 4032.35,675.86 4038.2,670 v1(4080,670)
  Bottom Layer w10: v1(4080,670) 4075,665 4040,665 4004,629 4004,585.09 4069.09,520 K12.3
NetIC3_26: IC3.26 K12.4 | length 248.4
  Top Layer w10: IC3.26 4093.58,731.42 4169.86,655.14 4169.86,630.14 K12.4
NetIC3_27: IC3.27 K12.5 | length 232.7
  Top Layer w10: IC3.27 4027.1,751.1 4066,790 4110,790 K12.5
NetIC3_30: IC3.30 R18.1 | length 1100.3
  Top Layer w10: v1(3855.91,820) 3860.75,815.16 3895.91,815.16 3900.91,810.16 IC3.30 ; v1(4278,510.58) 4393.58,395 R18.1
  Bottom Layer w10: v1(3855.91,820) 4004.43,820 4010.43,814 4191,814 4196.86,808.14 4220.54,732.73 cw(c4180,720) 4220.59,707.41 4220.59,685.44 4278,628.03 v1(4278,510.58)
NetIC3_31: IC3.31 K5.1 | length 661.2
  Top Layer w10: IC3.31 4144.02,829.84 4164.18,850 v1(4175,850)
  Bottom Layer w10: v1(4175,850) 4182.65,857.65 4194.42,857.65 4217.5,862.44 4235.82,872.59 4323.67,872.59 4400,860 4402.93,857.07 4540,720 K5.1
NetIC3_32: IC3.32 K5.2 | length 640.3
  Top Layer w10: IC3.32 4109.53,849.53 4158.44,898.44 v1(4203.44,898.44) ; v1(4505,830) 4510,825 4575,825 K5.2
  Bottom Layer w10: v1(4203.44,898.44) 4424.19,898.44 4492.63,830 v1(4505,830)
NetIC3_33: IC3.33 K5.3 | length 854.5
  Top Layer w10: v1(3912.96,877.04) 3923.78,877.04 3931.61,869.21 IC3.33
  Bottom Layer w10: v1(3912.96,877.04) 3916.59,877.04 3953.77,914.22 3968.13,914.22 4024,970.09 4024,989.91 4045.09,1011 4489,1011 K5.3
NetIC3_34: IC3.34 K8.2 | length 1005.9
  Top Layer w10: IC3.34 4096.41,888.9 4141.95,934.44 4218.35,934.44 4270,882.79 v1@4270,790 ; v1(4535,640) 4682.37,640 4752.23,709.86 4769.86,709.86 K8.2
  Bottom Layer w10: v1(4275,780) 4380,780 v1@4530,630
NetIC3_35: IC3.35 K8.3 | length 1239.4
  Top Layer w10: IC3.35 4023.58,908.58 4025,910 4027.96,910 4052.35,934.39 4052.35,967.35 v1(4060,975) ; K8.3 4895,935 v1(4895,975)
  Bottom Layer w10: v1(4060,975) 4372.49,975 4392.49,955 4449.56,897.93 4452.49,895 4546.35,895 4549.28,892.07 4549.42,891.93 ccw(c4580,920) 4610.58,891.93 4610.72,892.07 4613.65,895 4745.02,895 4747.94,892.07 4748.15,891.86 ccw(c4780,920) 4811.85,891.86 4812.05,892.07 4814.98,895 v1(4895,975)
NetIC3_39: IC3.39 K9.4 | length 391.9
  Top Layer w10: IC3.39 3898.9,1038.07 3920,1059.18 v1(3920,1070)
  Bottom Layer w10: v1(3920,1070) 3927.65,1077.65 3927.65,1107.65 3935,1115 3935,1175.79 3937.51,1178.3 3937.51,1227.51 K9.4
NetIC3_41: IC3.41 K9.5 | length 676.6
  Top Layer w10: IC3.41 3859.53,1069.53 3896,1106 3944.13,1106 3954.68,1095.46 v1(4004.54,1095.46)
  Bottom Layer w10: v1(4004.54,1095.46) 4004.54,1102.94 3980,1127.48 3980,1137.86 3988,1145.86 3988,1250 4016,1278 4064,1278 4080,1294 4080,1370 K9.5
NetIC3_44: IC3.44 K11.1 | length 279.2
  Top Layer w10: v1(3780,1120) 3780,1109.18 3800.47,1088.7 IC3.44
  Bottom Layer w10: v1(3780,1120) 3787.65,1127.65 3787.65,1147.65 K11.1
NetIC3_45: IC3.45 K11.2 | length 567.7
  Top Layer w10: IC3.45@3780.82,954.84 3780.82,944.18 v1(3829.54,895.46)
  Bottom Layer w10: v1(3829.54,895.46) 3830,895.91 3830,1086 3919,1175 3919,1182.42 3921.51,1184.93 3921.51,1258.49 K11.2
NetIC3_46: IC3.46 K10.4 R22.1 | length 1296.5
  Top Layer w10: v1(3754.96,895.09) 3761.07,901.2 IC3.46
  Top Layer w20: R22.1 3207.17,1738.83 v1(3429,1517)
  Bottom Layer w10: K10.4 3380,1245.73 3551.5,1074.24 3575.81,1074.24 v1(3754.96,895.09)
  Bottom Layer w20: K10.4 3429,1369 v1(3429,1517)
NetIC3_47: IC3.47 K10.2 R21.1 | length 1975.4
  Top Layer w10: K10.2 v1(3728.2,1320) ; v1(3680,1120) 3741.42,1058.58 IC3.47
  Top Layer w20: R21.1 2943.58,1927.58 2976,1960 3488,1960 3529,1919 3529,1369 K10.2
  Bottom Layer w10: v1(3680,1120) 3730,1170 3730,1318.2 v1(3728.2,1320)
NetIC3_48: IC3.48 K10.3 | length 711.2
  Top Layer w10: v1(3526,1038) 3547,1038 3603,982 3721.73,982 IC3.48
  Bottom Layer w10: K10.3 3380,1383 3358,1383 3336,1361 3336,1228 v1(3526,1038)
NetK2_MP1: K2.MP1 RE1.12 RE1.24 | length 1606.4
  Top Layer w70: 480,324.72 397.28,242 256.01,242 215,283.01 215,540 RE1.24 129.79,630.06 129.79,689.79 215,775 215,1012.48 263.41,1060.89 333.01,1060.89 429.19,1157.08 429.19,1195.37 528.19,1294.37 557.72,1294.37 K2.MP1
NetK3_MP1: K3.MP1 L1.3 | length 396
  Top Layer w70: L1.3 6004.26,2170 6033,2141.26 K3.MP1
NetK3_MP2: K3.MP2 L1.4 | length 396
  Top Layer w70: L1.4 6145.26,2270 6174,2298.74 K3.MP2
NetK4_2: K4.2 R6.2 R14.2 R15.1 R16.2 | length 2266.3
  Top Layer w20: R15.1 4768.58,1527.87 4805.25,1564.54 4868.71,1564.54 4869.26,1564 4881,1564 4970,1475 5072,1475 5080,1483 R16.2@5080,1512 ; R16.2 R16.2@5080,1512 ; v1(5187,1512) R16.2@5080,1512 ; v1(5248,1632.17) R14.2@5327.83,1712 ; R14.2 R14.2@5327.83,1712 ; v1(5397,1712) R14.2@5327.83,1712 ; R6.2 6053.92,1721.08 6053.92,1793.92 v1(6055,1795) ; v1(6438,1785) 6473,1820 K4.2
  Bottom Layer w20: v1(5187,1512) 5187,1571.17 v1(5248,1632.17) ; v1(5397,1712) 5448,1763 5633,1763 5665,1795 6238.63,1795 6248.63,1785 v1(6438,1785)
NetL1_1: L1.1 T4.3 | length 364.9
  Top Layer w70: T4.3 5337.24,2309.76 5377,2270 L1.1
NetR3_1: R3.1 T1.1 T2.2 T3.2 | length 916
  Top Layer w20: T3.2 4480,1829.45 4370.55,1720 4258,1720 4246.28,1731.72 4246.28,1889 4277.28,1920 T1.1 4280,2067 4305,2092 R3.1 4480,2133.58 T2.2
NetR4_1: R4.1 T4.1 | length 422.1
  Top Layer w20: R4.1 4841.42,1969 4919.42,2047 5008,2047 5091.24,2130.24 T4.1
NetR4_2: R4.2 T2.3 T3.3 | length 898.7
  Top Layer w20: v1(4380,1820) 4380,1828.12 4434.48,1882.6 T3.3 ; T2.3 4558.74,2024.38 4580,2003.12 v1(4580,1995) ; v1@4580,1991.13 v1(4580,1995) ; R4.2 4768.58,1927.87 4701.46,1995 v1(4580,1995)
  Bottom Layer w20: v1(4380,1820) 4380,1822.8 4417.49,1860.29 4417.49,1883.25 4449.24,1915 4508,1915 v1@4584,1991
NetR5_2: R5.2 R19.1 T1.2 | length 3418.6
  Top Layer w20: v1(3096,922.3) 3334.72,683.58 R19.1 ; v1(4080,2170) 4088.12,2170 4121.46,2136.66 4176.92,2136.66 R5.2 ; T1.2 4305.2,1845.2 4317,1857 4317,2018 ; v1(4335,2053) 4317,2035 4317,2018 ; v1(4430,2070) 4424.26,2064.26 4376.14,2064.26 4364.88,2053 4352,2053 4317,2018
  Bottom Layer w20: v1(3096,922.3) 3096,1239 3129,1272 3129,1590 3168,1629 4084.69,1629 4430,1974.31 v1(4430,2070) ; v1(4080,2170) 4197,2053 v1(4335,2053)
NetR10_1: R10.1 R11.2 | length 231.7
  Top Layer w20: R11.2 4841.42,1753 5007.17,1753 R10.1
NetR17_2: R17.2 R18.2 T5.2 | length 943.7
  Top Layer w20: R18.2 4466.42,278 4480,278 4480,528.54 4495,543.54 v1(4659.46,543.54) ; T5.2 4533.75,757.4 4546.35,770 v1(4680,770)
  Bottom Layer w20: v1(4659.46,543.54) 4659.46,551.66 4627,584.12 4627,731.08 4641.14,745.22 4647.1,745.22 4671.88,770 v1(4680,770)
pads on no net: IC3.4 IC3.5 IC3.6 IC3.7 IC3.8 IC3.9 IC3.11 IC3.13 IC3.18 IC3.19 IC3.36 IC3.37 K1.1 K1.2 K2.1 K2.2 K3.1 K3.2 K4.MP1 K4.MP2 K10.6 K10.8 RE1.14
copper on no net:
  other v2: 100,100 6800,100 100,2600 6800,2600

## Silkscreen, mask and mechanical layers (free items; w line width, h text height)
Top Overlay:
  text "Jelle Claes" at 5910,410 h60
  text "SoldeerStation" at 5910,310 h60
  text "22/23" at 5910,210 h60

## Text inside footprints (layer, text, board x,y; h text height)
B1: Top Overlay "~" at 975.02,2290 h60 r270; Top Overlay "~" at 975.02,2090 h60 r270; Top Overlay "-" at 1230.01,2290 h60 r270; Top Overlay "+" at 1220,2091 h60 r270
B2: Top Overlay "+" at 1220,1041 h60 r270; Top Overlay "-" at 1230.01,1240 h60 r270; Top Overlay "~" at 975.02,1040 h60 r270; Top Overlay "~" at 975.02,1240 h60 r270
K12: Top Overlay "5" at 4106,706 h40 r90; Top Overlay "1" at 4107,315 h40 r90